# Altium PCB MAGI'sPower.PcbDoc
Units mil, origin at the board's own origin, x right, y up, seen from the top; angles counter-clockwise.
Board outline 6000 x 4000 mil, 2 copper layers (Top Layer, Bottom Layer); 23 components, 14 nets, 102 pads, 150 vias.
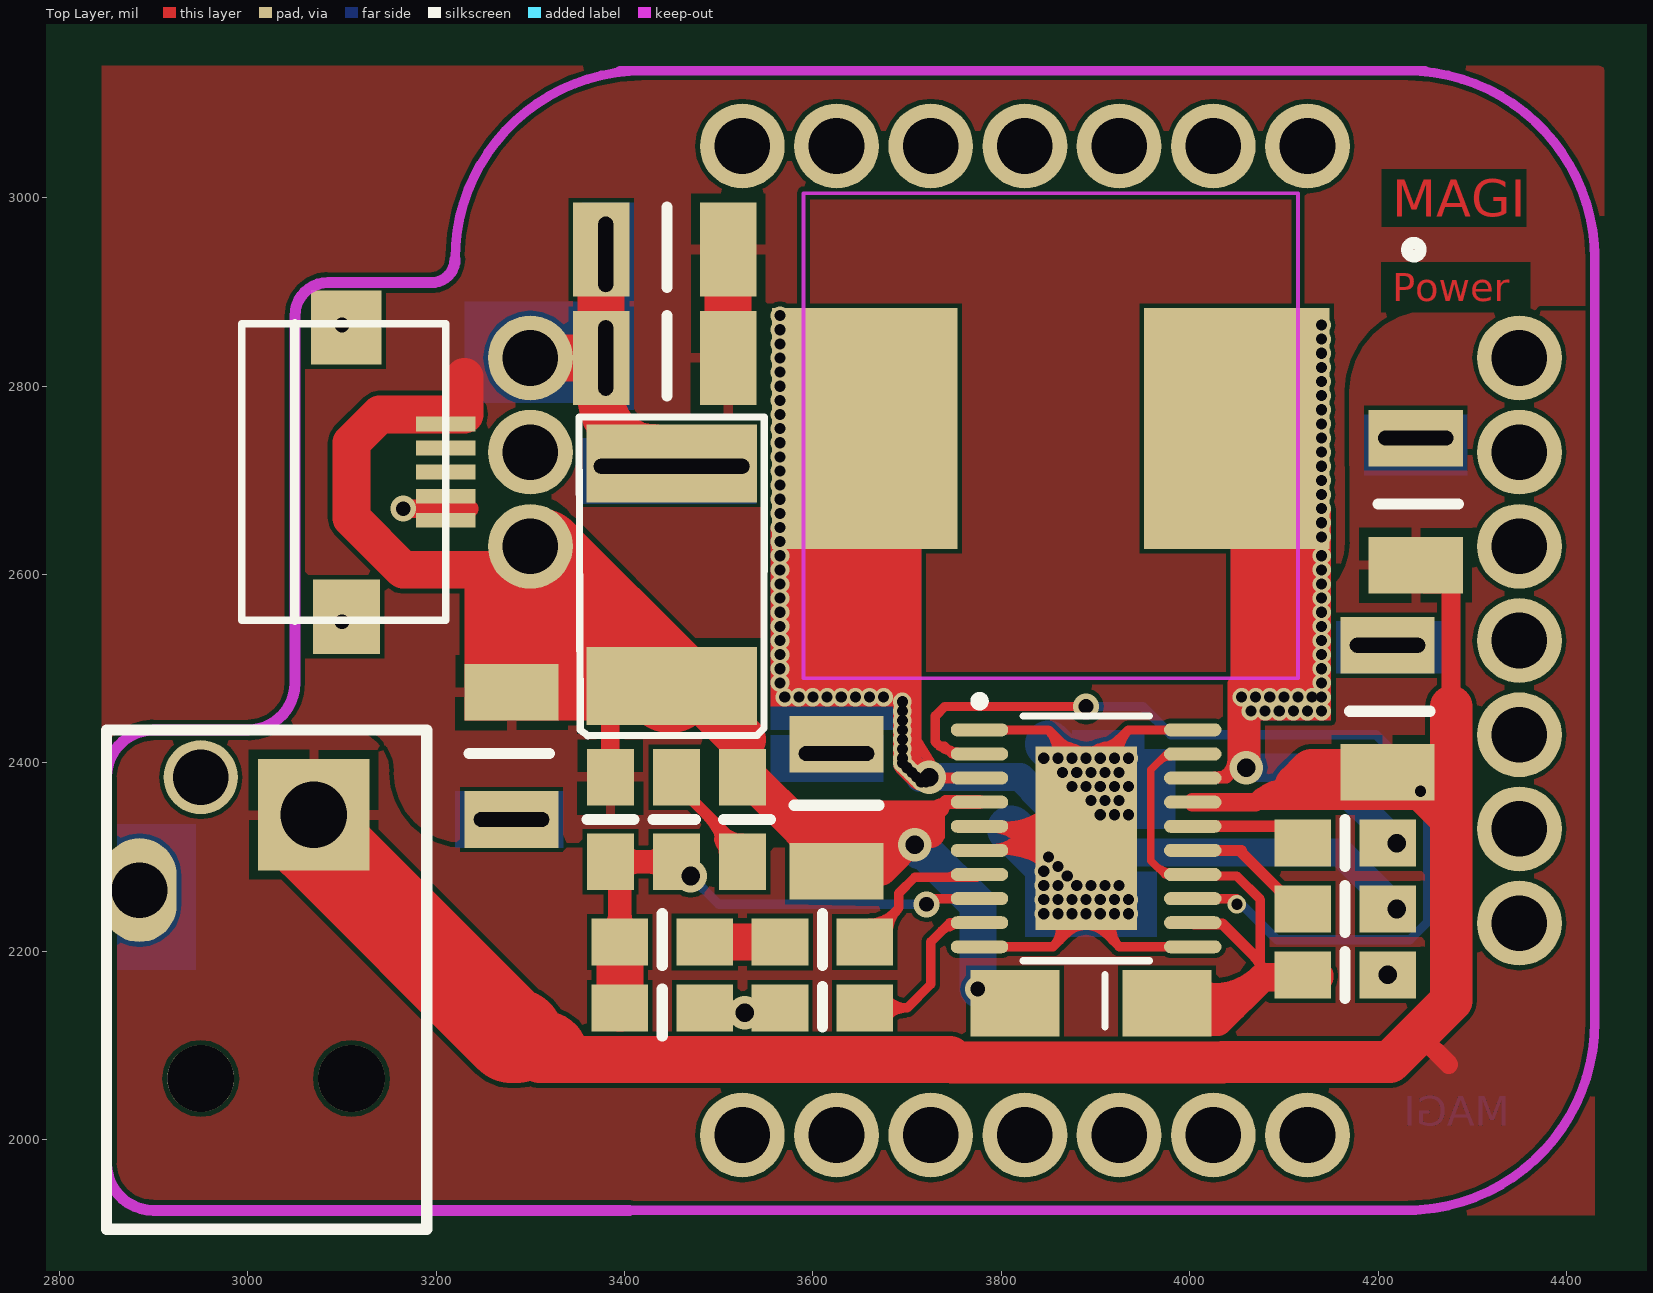
[diagram p0: Top Layer view]
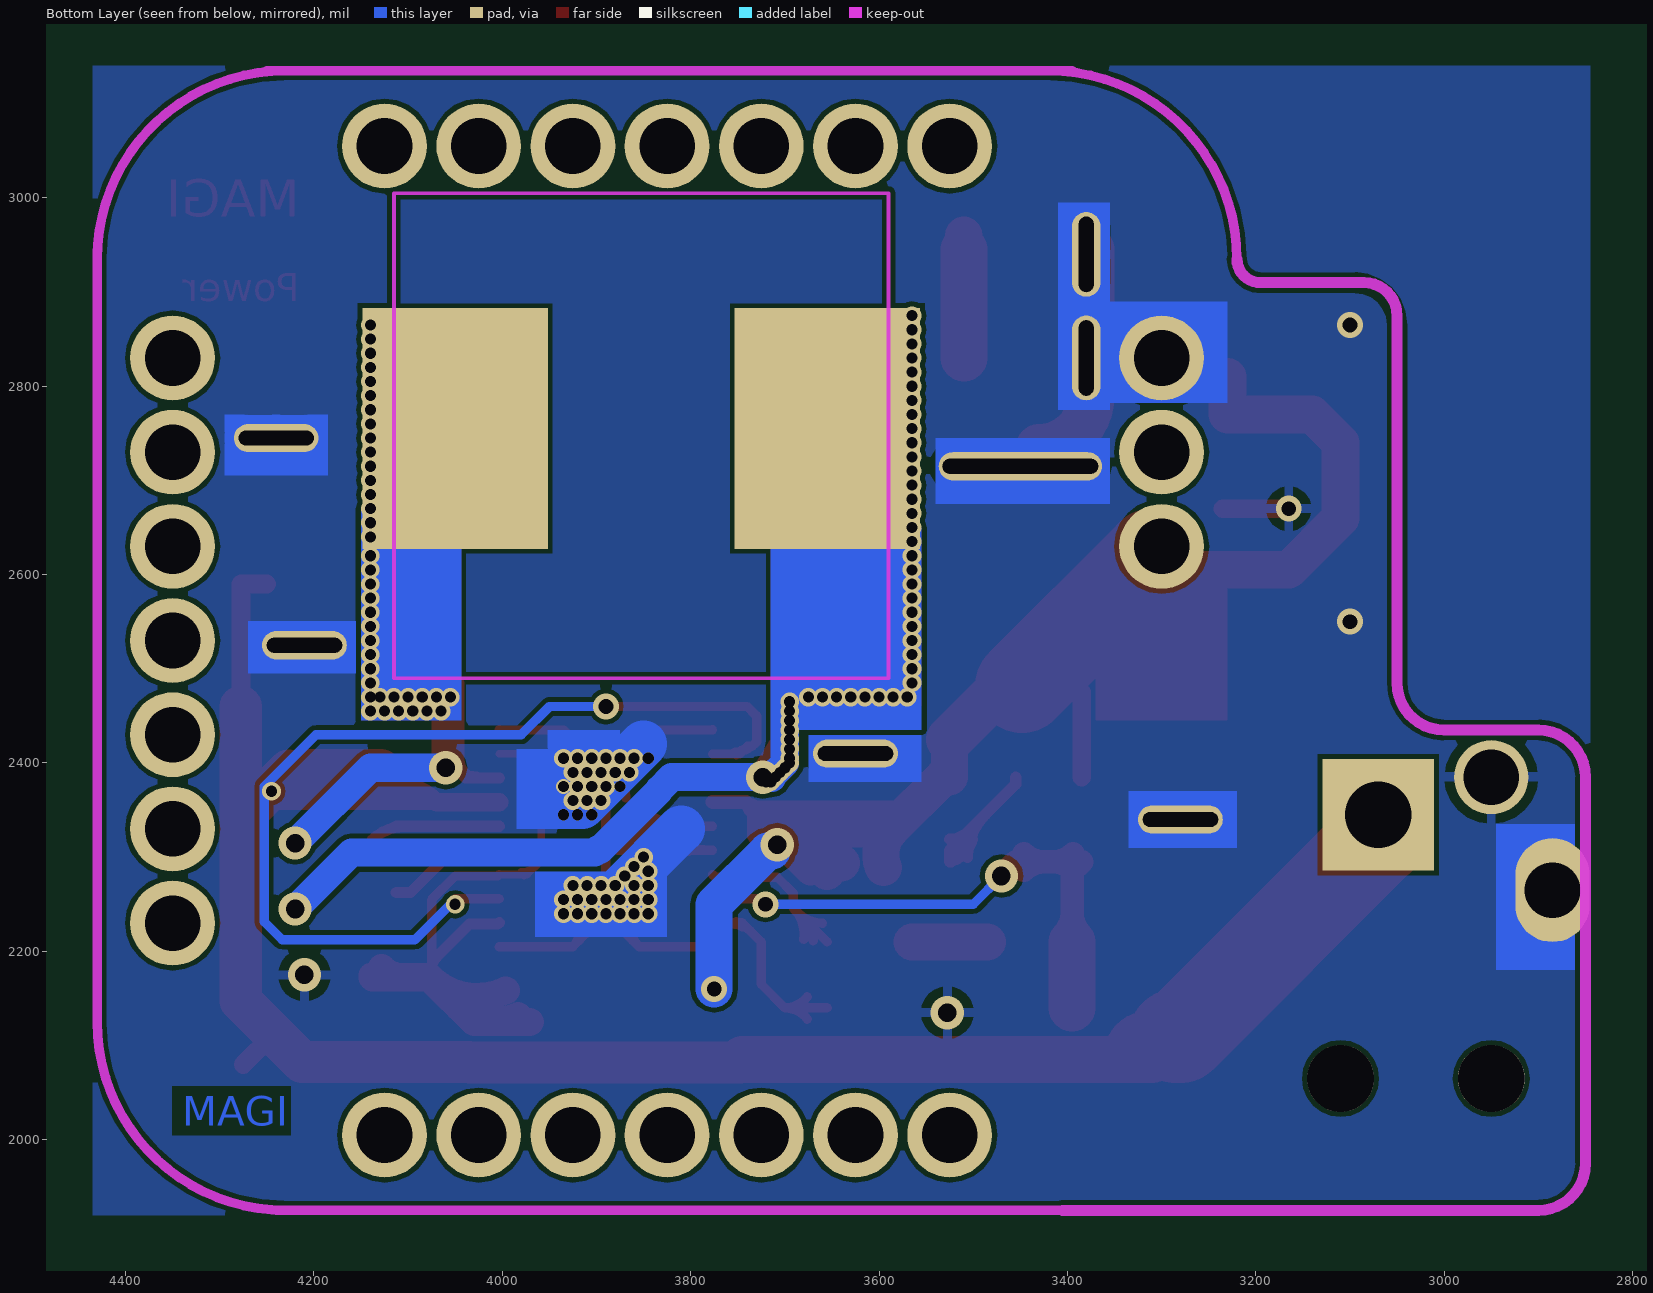
[diagram p1: Bottom Layer view, seen from below]

## Layer stack, top to bottom
Top Layer: signal copper 1.4
Dielectric: dielectric 12.6, FR-4, Dk 4.8
Bottom Layer: signal copper 1.4

## Board outline
1000,1000 7000,1000 7000,5000 1000,5000

## Design rules (kind name [scope] priority, off if disabled: settings)
Clearance [All] p1: gap=5
PolygonConnect [All] p1: connectstyle=Relief reliefconductorwidth=10 reliefentries=4 polygonreliefangle="90 Angle" airgapwidth=10
RoutingVias [All] p1: holewidth=28 width=50 viastyle="Through Hole" minholewidth=28 minwidth=50 maxholewidth=28 maxwidth=50
SolderMaskExpansion [All] p1: expansion=4
Width [All] p1: maxlimit=100 minlimit=5 preferedwidth=20
28 further rules are at their usual default settings.

## Classes and differential pairs
component class ltc3115: C1 C2 C3 C4 C5 C6 C7 C8 C9 J1 J2 J3 J4 L1 R1 R3 R4 R5 R6 R7 U1

## Components (designator, comment, footprint, x,y, rotation, side; value= is the part's Value field where it differs from the comment)
C1 "CAP_1" 0805 4120,2245 r0 top
C2 "CAP_1" 0805 3525,2385 r270 top
C3 "CAP_1" 0805 4210,2315 r180 top
C4 "CAP_1" 0805 3395,2210 r0 top
C5 "CAP_1" 1210 4240,2610 r90 top
C5 "CAP_1" 1210 3280,2475 r270 top
C5 "CAP_1" 1210 4210,2390 r90 top
C5 "CAP_1" 1210 3510,2830 r180 top
C5 "CAP_1" 1210 3510,2945 r180 top
C6 "CAP_1" 0805 4120,2175 r0 top
C9 "CAP_1" 1210 3625,2285 r90 top
D1 "DIODE_1" SMA 3895,2145 r0 top
L1 "INDUCTOR" 13*13 3895,2860 r0 top
R3 "RES1" 0805 3385,2295 r90 top
R4 "RES1" 0805 3455,2385 r270 top
R5 "RES1" 0805 3565,2210 r0 top
R6 "RES1" 0805 3485,2140 r180 top
R7 "RES1" 0805 3565,2140 r0 top
U1 "LTC3115" LTC3115 3890,2320 r0 top
? "Comment" MAGI-M8 3825,2530 r90 top
? "Comment" TAN-D-7343 3450,2600 r270 top
? "Comment" MicroUSB 3110,2715 r90 top
? "Comment" 4.0/1.7mm 3070,2345 r90 top

## Footprints (in the part's own frame and the unit in brackets; to place one, negate y for a bottom-side part, rotate by r counter-clockwise, add the part's x,y. Pads: shape width x height; smd on the part's side, far side on the other; paste and mask are expansions set on the pad)
4.0/1.7mm [mm]
  round 1.8 hole 1.8: 0(-7.112,-1.016) 0(-7.112,3.048)
  rect 3x3 hole 1.8: 1(0,0)
  oval 2.8x2 hole 1.5: 2(-2.032,4.699)
  round 2 hole 1.5: 2(1.016,3.048)
  silkscreen extent -11.18,-3.05 2.29,5.59
13*13 [mil]
  rect 196.85x255.91 all layers, no hole: 1(-240,-105) 2(155,-105)
  Keep-Out Layer lines w3.94: -305,-370 -305,145 220,145 220,-370 -305,-370
0805 [mil]
  rect 60x50 smd: 1(0,0) 2(90,0)
1210 [mil]
  rect 60x100 smd: 1(0,0) 2(135,0)
  silkscreen extent 65,-45 65,40
LTC3115 [mm] "TSOP, 20-Leads, Body 6.50x4.40mm, Pitch 0.65mm, Thermal Pad 4.95.2x2.74.2mm, IPC Medium Density"
  oval 1.55x0.35 smd: 1(-2.875,2.925) 2(-2.875,2.275) 3(-2.875,1.625) 4(-2.875,0.975) 5(-2.875,0.325) 6(-2.875,-0.325) 7(-2.875,-0.975) 8(-2.875,-1.625) 9(-2.875,-2.275) 10(-2.875,-2.925) 11(2.875,-2.925) 12(2.875,-2.275) 13(2.875,-1.625) 14(2.875,-0.975) 15(2.875,-0.325) 16(2.875,0.325) 17(2.875,0.975) 18(2.875,1.625) 19(2.875,2.275) 20(2.875,2.925)
  rect 2.74x4.95 smd: 21(0,0)
  silkscreen extent -3,-3.3 1.7,3.82, body extent -2.25,-3.3 2.25,3.3, height 1.2
MAGI-M8 [mil]
  round 90 hole 59.06: 1(300,525) 2(200,525) 3(100,525) 8(-525,300) 9(-525,200) 10(-525,100) 11(-525,0) 12(-525,-100) 13(-525,-200) 14(-525,-300) 15(-300,-525) 16(-200,-525) 17(-100,-525) 18(0,-525) 19(100,-525) 20(200,-525) 21(300,-525) 22(525,-300) 23(525,-200) 24(525,-100) 25(525,0) 26(525,100) 27(525,200) 28(525,300)
  Keep-Out Layer lines w10: 405,605 cw(c405,405) 605,405 ; 605,430 605,-425 ; -605,420 -605,290 -605,-415 ; -605,-405 ccw(c-405,-405) -405,-605 ; 605,-405 cw(c405,-405) 405,-605 ; -410,-605 415,-605
MicroUSB [mm]
  rect 0.4x1.6 smd: 1(1.143,-2.54) 2(0.493,-2.54) 3(-0.157,-2.54) 4(-0.807,-2.54) 5(-1.457,-2.54)
  rect 2x1.8 smd: 6(-4.057,0.135)
  rect 2x1.9 smd: 7(3.743,0.135)
  silkscreen extent -4.16,-2.54 3.84,2.96, body extent -4.26,-2.64 3.94,3.06, height 3
SMA [mm] "DO-214-AC/SMA; 2 C-Bend Leads; Body 5 x 2.7 mm, inc. leads (LxW)"
  rect 2.4x1.8 smd: 1(-2.05,0) 2(2.05,0)
  silkscreen extent 0.38,-0.64 0.38,0.76
TAN-D-7343 [mm]
  rect 2.1x4.6 smd: 1(-3,0) 2(3,0)
  silkscreen extent -4.25,-2.5 4.34,2.5, body extent -3.65,-2.15 3.65,2.15, height 2.9

## Part data
C1 C2 C3 C4 C5 C5 C5 C5 C5 C6 C9: "Capacitor"
D1: "Diode"

## Free pads (board coordinates)
  oval 90x30 hole 15.75 slot 80 at 0 deg: 0(3625,2410) 2(3280,2340) 2(4210,2525) 2(4240,2745)
  oval 30x90 hole 15.75 slot 80 at 90 deg: 2(3380,2830) 2(3380,2940)
  oval 173.23x30 hole 15.75 slot 165.35 at 0 deg: 3(3450,2715)

## Via types
v1: diameter 19.68, hole 11.81, Top Layer to Bottom Layer, 130 vias
v2: diameter 35.43, hole 19.68, Top Layer to Bottom Layer, 8 vias
v3: diameter 27.56, hole 15.75, Top Layer to Bottom Layer, 6 vias
v4: diameter 11.81, hole 11.81, Top Layer to Bottom Layer, 5 vias
v5: diameter 15.75, hole 11.81, Top Layer to Bottom Layer, 1 vias

## Nets (pads, with @x,y where several pads share a name; then routed paths per layer and width w, separated by ;. In a path a pad name is that pad's centre, name@x,y a point inside that pad or via, vN(x,y) a via of type N, cw(c..) or ccw(c..) an arc to the next point about the centre after c; other vN are vias at no path point)
GND: ?.1@3300,2830 ?.1@3450,2718.11 ?.2@2885,2265 ?.2@2950,2385 ?.4 ?.5 ?.6 ?.7 C5.2 C6.2 C9.2 pad.0 pad.2 pad.3 R6.1 R7.1 U1.1 U1.5 U1.6 U1.10 U1.11 U1.20 U1.21 | length 4409.8
  Top Layer w10: U1.10 3854.84,2204.84 ; U1.1 3776.97,2435 3850,2435 ; 3807.67,2310.56 ccw(c3810.06,2301.64) 3802.07,2306.26 cw(c3824.09,2293.54) 3817.51,2318.11 ; 3807.67,2329.44 cw(c3810.06,2338.36) 3802.07,2333.74 ccw(c3824.09,2346.46) 3817.51,2321.89 ; U1.21@3868.94,2363.04 cw(c3924.37,2364.26) 3910.02,2417.8 ; U1.21@3871.63,2417.36 cw(c3857.82,2365.86) U1.21@3911.01,2361.97 ; U1.21@3877.2,2332.8 U1.5 ; U1.11 3925.16,2204.84 ; U1.20 4003.03,2435 3935,2435 ; U1.6 ccw(c3776.81,2392.9) 3848.86,2346.5 cw(c3776.81,2392.9) U1.6 ; U1.6 3877.2,2307.2 U1.21 ; U1.5 cw(c3776.81,2247.1) 3848.86,2293.5 ccw(c3776.81,2247.1) U1.5 ; 3850,2435 cw(c3828.57,2413.57) 3852.06,2394.42 ccw(c3828.57,2413.57) 3850,2435 ; 3850,2435 3890,2395 U1.21@3890,2390 ; 3854.84,2204.84 ccw(c3836.04,2223.65) 3855.04,2242.25 cw(c3836.04,2223.65) 3854.84,2204.84 ; 3854.84,2204.84 v1(3890,2240) ; U1.21@3890,2227.56 ccw(c3890,2197.52) 3868.76,2218.76 cw(c3890,2197.52) U1.21@3890,2227.56 ; U1.21@3890,2227.56 cw(c3890,2197.52) 3911.24,2218.76 ccw(c3890,2197.52) U1.21@3890,2227.56 ; v1(3890,2240) 3925.16,2204.84 ; v1(3890,2240) U1.21 ; U1.21 U1.21@3890,2390 ; U1.21@3890,2390 3935,2435 ; U1.21@3890,2412.44 cw(c3890,2454.55) 3860.23,2424.77 ccw(c3890,2454.55) U1.21@3890,2412.44 ; U1.21@3890,2412.44 ccw(c3890,2466.62) 3928.31,2428.31 cw(c3890,2466.62) U1.21@3890,2412.44 ; 3925.16,2204.84 cw(c3943.96,2223.65) 3924.96,2242.25 ccw(c3943.96,2223.65) 3925.16,2204.84 ; 3935,2435 ccw(c3959.77,2410.23) 3930.66,2390.73 cw(c3959.77,2410.23) 3935,2435 ; U1.6@3795.15,2307.2 ccw(c3795.15,2381.09) 3857.26,2341.08 cw(c3795.15,2381.09) U1.6@3795.15,2307.2 ; U1.5@3795.15,2332.8 cw(c3795.15,2258.91) 3857.26,2298.92 ccw(c3795.15,2258.91) U1.5@3795.15,2332.8 ; U1.6@3802.75,2307.2 cw(c3802.75,2232.75) 3855.4,2285.4 ccw(c3802.75,2232.75) U1.6@3802.75,2307.2 ; U1.5@3802.75,2332.8 ccw(c3802.75,2407.25) 3855.4,2354.6 cw(c3802.75,2407.25) U1.5@3802.75,2332.8 ; 3813.48,2307.2 ccw(c3813.48,2369.28) 3865.67,2335.67 cw(c3813.48,2369.28) 3813.48,2307.2 ; 3813.48,2332.8 cw(c3813.48,2270.72) 3865.67,2304.33 ccw(c3813.48,2270.72) 3813.48,2332.8 ; 3826.89,2307.2 cw(c3826.89,2256.89) 3862.47,2292.47 ccw(c3826.89,2256.89) 3826.89,2307.2 ; 3826.89,2332.8 ccw(c3826.89,2383.11) 3862.47,2347.53 cw(c3826.89,2383.11) 3826.89,2332.8 ; 3831.82,2307.2 ccw(c3831.82,2357.47) 3874.08,2330.25 cw(c3831.82,2357.47) 3831.82,2307.2 ; 3831.82,2332.8 cw(c3831.82,2282.53) 3874.08,2309.75 ccw(c3831.82,2282.53) 3831.82,2332.8 ; 3857.83,2427.17 cw(c3837.2,2406.54) 3859.82,2388.1 ccw(c3837.2,2406.54) 3857.83,2427.17 ; 3861.99,2211.99 ccw(c3843.26,2230.72) 3862.18,2249.25 cw(c3843.26,2230.72) 3861.99,2211.99 ; 3865.66,2419.34 cw(c3845.82,2399.51) 3867.57,2381.78 ccw(c3845.82,2399.51) 3865.66,2419.34 ; 3869.13,2219.13 ccw(c3850.48,2237.79) 3869.33,2256.25 cw(c3850.48,2237.79) 3869.13,2219.13 ; U1.21@3910.67,2256.25 ccw(c3929.52,2237.79) 3910.87,2219.13 cw(c3929.52,2237.79) U1.21@3910.67,2256.25 ; U1.21@3914.04,2379.61 cw(c3939.15,2396.42) 3917.78,2417.78 ccw(c3939.15,2396.42) U1.21@3914.04,2379.61 ; U1.21@3917.82,2249.25 ccw(c3936.74,2230.72) 3918.01,2211.99 cw(c3936.74,2230.72) U1.21@3917.82,2249.25 ; U1.21@3922.35,2385.17 cw(c3949.46,2403.32) 3926.39,2426.39 ccw(c3949.46,2403.32) U1.21@3922.35,2385.17
  Top Layer w20: v3(3165,2670) 3235,2670
  Top Layer w50: ?.1@3300,2830 C5.2@3375,2830 ; C5.2@3375,2945 C5.2@3375,2830 ; ?.1@3430,2735 cw(c3430,2790) 3375,2790 C5.2@3375,2830
  Bottom Layer w50: 3810,2330 v1@3875,2265 ; 3850,2420.22 v1@3915.22,2355
  other v1: 3845,2240 3860,2240 3875,2240 3905,2240 3920,2240 3935,2240 3845,2255 3860,2255 3875,2255 3890,2255 3905,2255 3920,2255 3935,2255 3845,2270 3860,2270 3880,2270 3895,2270 3910,2270 3925,2270 3870,2280 3845,2285 3860,2290 3850,2300 3895,2360 3910,2360 3925,2360 3890,2375 3905,2375 3920,2375 3865,2390 3880,2390 3895,2390 3910,2390 3925,2390 3860,2405 3875,2405 3890,2405 3905,2405 3920,2405 3935,2405
  other v2: 3527.5,2135 4210,2175
  other v3: 3100,2550 3100,2865
  other v4: 3905,2345 3920,2345 3935,2345 3875,2375 3845,2405
  other v5: 3935,2375
NetC1_1: C1.1 U1.15 | length 126.9
  Top Layer w11.81: U1.15 4055,2307.2 ; 4055,2305 4065.62,2294.38 4086.88,2273.12 4097.5,2262.5 C1.1@4112.5,2262.5
NetC1_2: C1.2 L1.1 U1.3 | length 650.6
  Top Layer w10: 3710,2425 v2@3725,2400
  Top Layer w11.81: v2@3724.42,2385.58 3726.02,2383.98 U1.3
  Bottom Layer w30: v1@3713.98,2383.98 3715,2385 3820,2385 3833.5,2371.5 3833.5,2370.53 3896.16,2307.87 3898.62,2307.87 3901.49,2305 4160,2305 v2(4220,2245) ; v1@3720,2385 v2(3723.42,2385)
  other v1: 3715,2380 3720,2380 3710,2385 3705,2390 3700,2395 3695,2400 3695,2405 3695,2415 3695,2425 3695,2435 3695,2445 3695,2455 3695,2465 3570,2470 3585,2470 3600,2470 3615,2470 3630,2470 3645,2470 3660,2470 3675,2470 3565,2485 3565,2500 3565,2515 3565,2530 3565,2545 3565,2560 3565,2575 3565,2590 3565,2605 3565,2620 3565,2635 3565,2650 3565,2665 3565,2680 3565,2695 3565,2710 3565,2725 3565,2740 3565,2755 3565,2770 3565,2785 3565,2800 3565,2815 3565,2830 3565,2845 3565,2860 3565,2875
NetC2_2: C2.2 R4.1 | length 520
  Top Layer w12: R4.1 3455,2377.37 3525,2307.37 C2.2 ; 3487.35,2345.02 cw(c3442.33,2300) C2.2@3506,2300 ; 3487.35,2345.02 cw(c3442.33,2300) C2.2@3506,2300 ; 3487.35,2345.02 cw(c3442.33,2300) C2.2@3506,2300 ; C2.2@3500.83,2319.3 ccw(c3534.53,2328.33) C2.2@3523.41,2295.26 ; C2.2@3500.83,2319.3 ccw(c3534.53,2328.33) C2.2@3523.41,2295.26 ; C2.2@3500.83,2319.3 ccw(c3534.53,2328.33) C2.2@3523.41,2295.26 ; 3505.15,2327.22 ccw(c3525,2347.07) C2.2@3525,2319 ; 3505.15,2327.22 ccw(c3525,2347.07) C2.2@3525,2319 ; 3505.15,2327.22 ccw(c3525,2347.07) C2.2@3525,2319 ; C2.2@3507.84,2324.54 cw(c3483.3,2300) C2.2@3518,2300 ; C2.2@3507.84,2324.54 cw(c3483.3,2300) C2.2@3518,2300 ; C2.2@3507.84,2324.54 cw(c3483.3,2300) C2.2@3518,2300
NetC3_1: C3.1 L1.2 U1.18 | length 541.1
  Top Layer w10: U1.18@4026.81,2384.96 ccw(c4026.81,2403.15) 4045,2403.15 4045,2485
  Top Layer w11.81: U1.18 4038.98,2383.98 v2@4060,2405 ; U1.18@4026.81,2384.96 ccw(c4026.81,2416.71) v2@4049.26,2394.26 ; U1.18@4026.81,2384.96 ccw(c4026.81,2416.71) v2@4049.26,2394.26 ; U1.18@4026.81,2384.96 ccw(c4026.81,2416.71) v2@4049.26,2394.26
  Top Layer w30: v2(4060,2395) 4060,2490
  Bottom Layer w30: v2@4057.76,2395 4140,2395 v2(4220,2315)
  other v1: 4065,2455 4080,2455 4095,2455 4110,2455 4125,2455 4140,2455 4055,2470 4070,2470 4085,2470 4100,2470 4115,2470 4130,2470 4140,2470 4140,2485 4140,2500 4140,2515 4140,2530 4140,2545 4140,2560 4140,2575 4140,2590 4140,2605 4140,2620 4140,2640 4140,2655 4140,2670 4140,2685 4140,2700 4140,2715 4140,2730 4140,2745 4140,2760 4140,2775 4140,2790 4140,2805 4140,2820 4140,2835 4140,2850 4140,2865
NetC3_2: C3.2 U1.16 | length 187.9
  Top Layer w11.81: U1.16 C3.2@4112.8,2332.8 ; C3.2@4102.97,2332.8 cw(c4102.97,2282.97) 4138.2,2318.2 ccw(c4102.97,2282.97) C3.2@4102.97,2332.8
NetC4_1: C4.1 R3.1 R4.2 R6.2 U1.8 | length 996.8
  Top Layer w10: v3@3720,2256.02 U1.8
  Top Layer w25: C4.1 3395,2285 R3.1 R4.2 v2(3470,2280) ; C4.1@3386.16,2218.84 ccw(c3364.82,2240.18) 3395,2240.18 ; C4.1@3386.16,2218.84 ccw(c3364.82,2240.18) 3395,2240.18 ; C4.1@3386.16,2218.84 ccw(c3364.82,2240.18) 3395,2240.18 ; R3.1@3393.84,2286.16 cw(c3415.18,2264.82) 3415.18,2295 ; R3.1@3393.84,2286.16 cw(c3415.18,2264.82) 3415.18,2295 ; R3.1@3393.84,2286.16 cw(c3415.18,2264.82) 3415.18,2295 ; R3.1@3393.84,2303.84 ccw(c3415.18,2325.18) 3415.18,2295 ; R3.1@3393.84,2303.84 ccw(c3415.18,2325.18) 3415.18,2295 ; R3.1@3393.84,2303.84 ccw(c3415.18,2325.18) 3415.18,2295 ; 3395,2240.18 ccw(c3425.18,2240.18) C4.1@3403.84,2218.84 ; 3395,2240.18 ccw(c3425.18,2240.18) C4.1@3403.84,2218.84 ; 3395,2240.18 ccw(c3425.18,2240.18) C4.1@3403.84,2218.84 ; 3424.82,2295 ccw(c3424.82,2325.18) R4.2@3446.16,2303.84 ; 3424.82,2295 cw(c3424.82,2264.82) R4.2@3446.16,2286.16 ; 3424.82,2295 ccw(c3424.82,2325.18) R4.2@3446.16,2303.84 ; 3424.82,2295 cw(c3424.82,2264.82) R4.2@3446.16,2286.16 ; 3424.82,2295 ccw(c3424.82,2325.18) R4.2@3446.16,2303.84 ; 3424.82,2295 cw(c3424.82,2264.82) R4.2@3446.16,2286.16
  Top Layer w50: R6.2 C4.1
  Bottom Layer w10: v2(3470,2280) 3500,2250 v3(3720.56,2250)
NetC4_2: C4.2 R5.1 | length 80
  Top Layer w39.37: C4.2 R5.1
NetR1_2: 
NetR5_2: R5.2 U1.7 | length 457.3
  Top Layer w10: R5.2 3691.22,2246.22 ; U1.7 3773.98,2278.78 3708.08,2278.78 3691.22,2261.92 3691.22,2246.22 ; R5.2@3660,2230 ccw(c3660,2266.21) 3685.61,2240.61 ; R5.2@3660,2230 ccw(c3660,2266.21) 3685.61,2240.61 ; R5.2@3660,2230 ccw(c3660,2266.21) 3685.61,2240.61 ; R5.2@3669.91,2211.31 cw(c3694.25,2214.53) R5.2@3676.89,2231.89 ; R5.2@3669.91,2211.31 cw(c3694.25,2214.53) R5.2@3676.89,2231.89 ; R5.2@3669.91,2211.31 cw(c3694.25,2214.53) R5.2@3676.89,2231.89 ; R5.2@3679.83,2212.62 cw(c3719.56,2217.88) 3691.22,2246.22 ; R5.2@3679.83,2212.62 cw(c3719.56,2217.88) 3691.22,2246.22 ; R5.2@3679.83,2212.62 cw(c3719.56,2217.88) 3691.22,2246.22 ; 3741.78,2278.78 ccw(c3741.78,2293.02) U1.7@3751.85,2282.95 ; 3741.78,2278.78 ccw(c3741.78,2293.02) U1.7@3751.85,2282.95 ; 3741.78,2278.78 ccw(c3741.78,2293.02) U1.7@3751.85,2282.95
NetR7_2: R7.2 U1.9 | length 432.8
  Top Layer w10: R7.2 3700,2140 ; U1.9 3745.43,2230.43 3725,2210 3725,2165 3700,2140 ; R7.2@3676,2128 cw(c3700,2110) 3700,2140 ; R7.2@3676,2128 cw(c3700,2110) 3700,2140 ; R7.2@3676,2128 cw(c3700,2110) 3700,2140 ; R7.2@3676,2152 ccw(c3700,2170) 3700,2140 ; R7.2@3676,2152 ccw(c3700,2170) 3700,2140 ; R7.2@3676,2152 ccw(c3700,2170) 3700,2140 ; 3736.72,2221.72 cw(c3753.19,2205.26) U1.9@3753.19,2228.54 ; 3736.72,2221.72 cw(c3753.19,2205.26) U1.9@3753.19,2228.54 ; 3736.72,2221.72 cw(c3753.19,2205.26) U1.9@3753.19,2228.54 ; 3745,2226.35 ccw(c3742.2,2236.78) U1.9@3751.55,2231.38 ; 3745,2226.35 ccw(c3742.2,2236.78) U1.9@3751.55,2231.38 ; 3745,2226.35 ccw(c3742.2,2236.78) U1.9@3751.55,2231.38
VCC: C6.1 D1.2 U1.12 U1.14 U1.19 | length 1332
  Top Layer w8: 3971.02,2286.21 ccw(c3976.36,2291.55) U1.14@3978.68,2284.36 ; U1.14 3973.39,2281.61 3958.68,2296.32 3958.68,2392.63 3975.62,2409.57 U1.19 ; 3964.08,2290.92 ccw(c3979.57,2306.4) U1.14@3979.57,2284.5 ; 3964.08,2290.92 ccw(c3979.57,2306.4) U1.14@3979.57,2284.5 ; 3964.08,2290.92 ccw(c3979.57,2306.4) U1.14@3979.57,2284.5 ; 3967.04,2287.86 cw(c3962.77,2271.92) U1.14@3977.06,2280.17 ; 3967.04,2287.86 cw(c3962.77,2271.92) U1.14@3977.06,2280.17 ; 3967.04,2287.86 cw(c3962.77,2271.92) U1.14@3977.06,2280.17 ; 3967.89,2401.84 cw(c3979.57,2390.16) U1.19@3979.57,2406.68 ; 3967.89,2401.84 cw(c3979.57,2390.16) U1.19@3979.57,2406.68 ; 3967.89,2401.84 cw(c3979.57,2390.16) U1.19@3979.57,2406.68
  Top Layer w10: U1.14 4004.8,2280 4050,2280 4075,2255 4075,2185.2
  Top Layer w11.81: U1.12 4004.37,2229.25 4034.64,2229.25 4067.67,2196.22 cw(c4043.95,2172.5) 4075,2185.2 cw(c4043.95,2172.5) 4077.5,2172.5
  Top Layer w25: C6.1@4137.5,2172.5 C6.1@4140,2175
  Top Layer w30: D1.2@3970.71,2125 4030,2125 4077.5,2172.5 ; C6.1@4137.5,2172.5 4077.5,2172.5 ; D1.2@3983.42,2131.36 ccw(c4007.58,2182.26) 4047.42,2142.42 ; D1.2@3983.42,2131.36 ccw(c4007.58,2182.26) 4047.42,2142.42 ; D1.2@3983.42,2131.36 ccw(c4007.58,2182.26) 4047.42,2142.42 ; D1.2@3996.28,2158.46 ccw(c4026.94,2223.06) 4077.5,2172.5 ; D1.2@3996.28,2158.46 ccw(c4026.94,2223.06) 4077.5,2172.5 ; D1.2@3996.28,2158.46 ccw(c4026.94,2223.06) 4077.5,2172.5 ; C6.1@4104.82,2172.5 ccw(c4104.82,2205.18) C6.1@4127.93,2182.07 ; C6.1@4104.82,2172.5 ccw(c4104.82,2205.18) C6.1@4127.93,2182.07 ; C6.1@4104.82,2172.5 ccw(c4104.82,2205.18) C6.1@4127.93,2182.07
VIN: ?.1@3070,2345 C5.1@4210,2390 C5.1@4240,2610 U1.2 U1.13 U1.17 | length 3357.9
  Top Layer w10: U1.2 3747.82,2409.57 3739.67,2417.72 3734.71,2417.72 3730,2422.43 3730,2450 3740,2460 v3@3880,2460 ; U1.13 v1@4050,2256.02 ; 3732.33,2420.1 ccw(c3753.19,2440.96) U1.2@3753.19,2411.46 ; 3732.33,2420.1 ccw(c3753.19,2440.96) U1.2@3753.19,2411.46 ; 3732.33,2420.1 ccw(c3753.19,2440.96) U1.2@3753.19,2411.46 ; 3745,2413.65 cw(c3742.2,2403.22) U1.2@3751.55,2408.62 ; 3745,2413.65 cw(c3742.2,2403.22) U1.2@3751.55,2408.62 ; 3745,2413.65 cw(c3742.2,2403.22) U1.2@3751.55,2408.62
  Top Layer w12: 4112.56,2372.56 4115,2375
  Top Layer w20: 3305,2125 cw(c3315,2090) 3350,2100 ; U1.17 4070,2358.39 cw(c4110.11,2318.28) 4110.11,2375 ; 4245,2110 4275,2080 ; C5.1@4250,2590 4277.5,2590 4277.5,2460
  Top Layer w45: 3745,2085 3747.93,2082.07 4034.34,2082.07 4034.78,2082.5 4212.5,2082.5 4277.5,2147.5 4277.5,2341.39 ; C5.1@4226.95,2391.95 4277.5,2341.39 ; 4277.5,2460 4277.5,2341.39
  Top Layer w50: 3285,2110 3310,2085 3745,2085 ; 4115,2375 4130,2390 C5.1@4210,2390
  Top Layer w100: ?.1@3070,2345 3070,2320 3280,2110 3285,2110
  Bottom Layer w10: v3(3890,2460) 3950,2460 3980,2430 4197.72,2430 4252.72,2375 4252.72,2231.45 4233.55,2212.28 4092.72,2212.28 v1@4051.99,2253.01
  other v1: 4050,2250 4245,2370
VOUT: ?.1@3210,2760 ?.2@3450,2481.89 ?.3@3300,2630 C2.1 C5.1@3280,2475 C5.1@3510,2830 C5.1@3510,2945 C9.1 D1.1 R3.2 U1.4 | length 2147.5
  Top Layer w10: 3710,2337.6 ccw(c3710,2362.5) 3727.61,2344.89 ; 3735,2352.28 3741.1,2358.39
  Top Layer w15: 3741.1,2358.39 U1.4
  Top Layer w19.68: R3.2 ?.2@3385,2475
  Top Layer w20: 3727.61,2344.89 3735,2352.28
  Top Layer w30: C9.1@3672.97,2285 v2@3710,2322.03 ; v2@3712.97,2325 3725,2325
  Top Layer w39.37: 3525,2425 C2.1 3531.98,2385 3586.98,2330 ; C9.1@3654.82,2288.17 cw(c3680.46,2296.44) 3661.41,2315.5 ; 3710,2337.6 3682.4,2337.6 3680,2340 3670,2330 ; 3586.98,2330 cw(c3560,2303.02) C9.1@3595.42,2288.83 ; 3586.98,2330 cw(c3560,2303.02) C9.1@3595.42,2288.83 ; 3586.98,2330 cw(c3560,2303.02) C9.1@3595.42,2288.83 ; 3586.98,2330 3670,2330 ; C9.1@3639.84,2293.93 ccw(c3610.38,2344.96) 3667.29,2329.71 ; C9.1@3639.84,2293.93 ccw(c3610.38,2344.96) 3667.29,2329.71 ; C9.1@3639.84,2293.93 ccw(c3610.38,2344.96) 3667.29,2329.71 ; C9.1@3655.22,2286.36 cw(c3706.77,2293.23) 3670,2330 ; C9.1@3655.22,2286.36 cw(c3706.77,2293.23) 3670,2330 ; C9.1@3655.22,2286.36 cw(c3706.77,2293.23) 3670,2330 ; C9.1@3655.32,2285 cw(c3728.5,2285) 3676.75,2336.75 ; C9.1@3655.32,2285 cw(c3728.5,2285) 3676.75,2336.75 ; C9.1@3655.32,2285 cw(c3728.5,2285) 3676.75,2336.75
  Top Layer w40: 3230,2810 3230,2770 3140,2770 3110,2740 3110,2660.12 3165.12,2605 3275,2605 ?.3@3290,2620 ; C5.1@3510,2945 C5.1@3510,2960
  Top Layer w50: ?.2@3448.11,2481.89 ?.2@3450,2481.89 ; ?.2@3465,2485 3525,2425 ; C5.1@3510,2830 C5.1@3510,2945
  Top Layer w100: ?.3@3310,2620 ?.2@3448.11,2481.89
  Bottom Layer w39.37: v2@3713.52,2306.48 3718.47,2306.48 3775,2249.96 v3(3775,2160)
  other v2: 3708.25,2313.25
pads on no net: ?.0 ?.2@3210,2734.41 ?.2@3300,2730 ?.3@3210,2708.82 ?.8 ?.9 ?.10 ?.11 ?.12 ?.13 ?.14 ?.15 ?.16 ?.17 ?.18 ?.19 ?.20 ?.21 ?.22 ?.23 ?.24 ?.25 ?.26 ?.27 ?.28

## Polygon pours and split planes (outlines as drawn)
no net on Bottom Solder "Keep-Out Layer-No Net" (solid): 3910,2330 3970,2330 3970,2450 3810,2450 3810,2430 3910,2330
no net on Bottom Solder "Keep-Out Layer-No Net" (solid): 3810,2365 3810,2195 3970,2195 3970,2285 3890,2285
no net on Bottom Solder "Keep-Out Layer-No Net" (solid): 3835,2405 3910,2330 3930,2330 3945,2330 3945,2420 3835,2420
no net on Bottom Solder "Keep-Out Layer-No Net" (solid): 3835,2330 3885,2280 3945,2280 3945,2225 3945,2220 3835,2220
GND on Bottom Layer "Keep-Out Layer-No Net" (solid, pour order 4): 2845,1920 4435,1920 4435,3140 2845,3140
VOUT on Top Layer "Keep-Out Layer-No Net" (solid, pour order 12): 2845,3140 4435,3140 cw(c4435,3135) 4440,3135 4440,1920 cw(c4435,1920) 4435,1915 2855,1915 2845,1915
VIN on Top Layer "Keep-Out Layer-No Net" (solid, pour order 10): 2850,2435 3105,2435 cw(c3105,2390) 3150,2390 ccw(c3230,2390) 3230,2310 3260,2310 3875,2310 ccw(c3875,2410) 3975,2410 3975,2435 3975,2465 cw(c4075,2465) 4075,2565 4100,2565 ccw(c4100,2635) 4170,2635 4170,2795 cw(c4255,2795) 4255,2880 4430,2880 4430,1920 2850,1920 2850,2435

## Keep-outs
Keep-Out Layer:
  lines w11.81: 3220,2935 cw(c3195,2935) 3195,2910 3085,2910 ccw(c3085,2875) 3050,2875 3050,2485 cw(c3000,2485) 3000,2435 2900,2435 ccw(c2900,2385) 2850,2385 2850,1975 ccw(c2900,1975) 2900,1925 3405,1925

## Other copper
Top Layer:
  rectangle net VOUT: 3230,2445 3370,2590
  rectangle net VOUT: 3580,2348.59 3731.3,2360
  rectangle net VOUT: 3720,2320 3740,2345
  rectangle net VOUT: 3705,2344.89 3727.61,2355
  rectangle net VIN: 4075,2350 4245,2370
  text "MAGI" at 4215,2980 h39.37
  text "Power" at 4215,2890 h30
Bottom Layer:
  rectangle net GND: 2861.12,2180 2945,2335
  rectangle net GND: 3230,2781.98 3361.98,2890
  rectangle net GND: 3355,2775 3410,2995
  rectangle net GND: 3555,2380 3675,2429.59
  rectangle net GND: 3220,2310 3335,2370
  rectangle net GND: 3355,2675 3540,2745
  rectangle net GND: 4185,2705 4295,2770
  rectangle net GND: 4155.41,2495 4270,2550.49
  rectangle net GND: 3915,2330 3985,2415
  rectangle net GND: 3875,2370 3952.23,2435
  rectangle net GND: 3825,2215 3965,2285
  rectangle net NetC1_2: 3555,2435 3710,2460
  text "MAGI" at 4340,2015 h31.5
Multi-Layer:
  rectangle net NetC1_2: 3555,2460 3715,2650
  rectangle net NetC3_1: 4043.54,2445 4150,2670
  lines w30 net NetC1_2: 3700,2490 3700,2400 3714.42,2385.58 3724.42,2385.58

## Silkscreen, mask and mechanical layers (free items; w line width, h text height)
Top Overlay:
  circle w13: c4237.93,2945 r7.07
  lines w11.81: 3360,2340 3410,2340 ; 3430,2340 3475,2340 ; 3440,2110 3440,2160 ; 3440,2185 3440,2240 ; 3505,2340 3555,2340 ; 3610,2120 3610,2162.44 ; 3610,2185 3610,2240 ; 4165,2150 4165,2200 ; 4165,2220 4165,2270 ; 4165,2290 4165,2340
Top Solder:
  rectangle: 4075,2350 4245,2370
  rectangle: 4043.54,2445 4150,2670
  rectangle: 3555,2460 3715,2650
  lines w10: 3710,2425 3725,2400 ; 4026.81,2384.96 ccw(c4026.81,2403.15) 4045,2403.15 4045,2485
  lines w12: 4112.56,2372.56 4115,2375
  lines w20: 3300,2115 cw(c3310,2080) 3345,2090 ; 4003.19,2358.39 4070,2358.39 cw(c4110.11,2318.28) 4110.11,2375
  lines w30: 3290,2075 3320,2075 ; 3700,2490 3700,2400 3714.42,2385.58 3724.42,2385.58 ; 4060,2395 4060,2490
  lines w39.37: 3531.98,2385 3618.49,2298.49
  lines w40: 3327.07,2082.07 3742.93,2082.07 4029.34,2082.07 4212.07,2082.07
  lines w45: 4212.07,2082.07 4277.5,2147.5 4277.5,2341.39 4226.95,2391.95
  lines w50: 3465,2485 3532.5,2417.5 ; 4115,2375 4130,2390 4210,2390
  lines w100: 3070,2345 3070,2320 3280,2110 3285,2110 ; 3300,2600 3300,2490 3380,2490
Bottom Solder:
  rectangle: 3555,2460 3715,2650
  rectangle: 4043.54,2445 4150,2670
  rectangle: 3555,2435 3710,2460
  lines w30: 3700,2490 3700,2400 3714.42,2385.58 3724.42,2385.58